# Altium PCB pidbot.PcbDoc
Units mm, origin at the board's own origin, x right, y up, seen from the top; angles counter-clockwise.
Board outline 66.55 x 54.25 mm, 2 copper layers (Top Layer, Bottom Layer); 52 components, 37 nets, 210 pads, 23 vias.
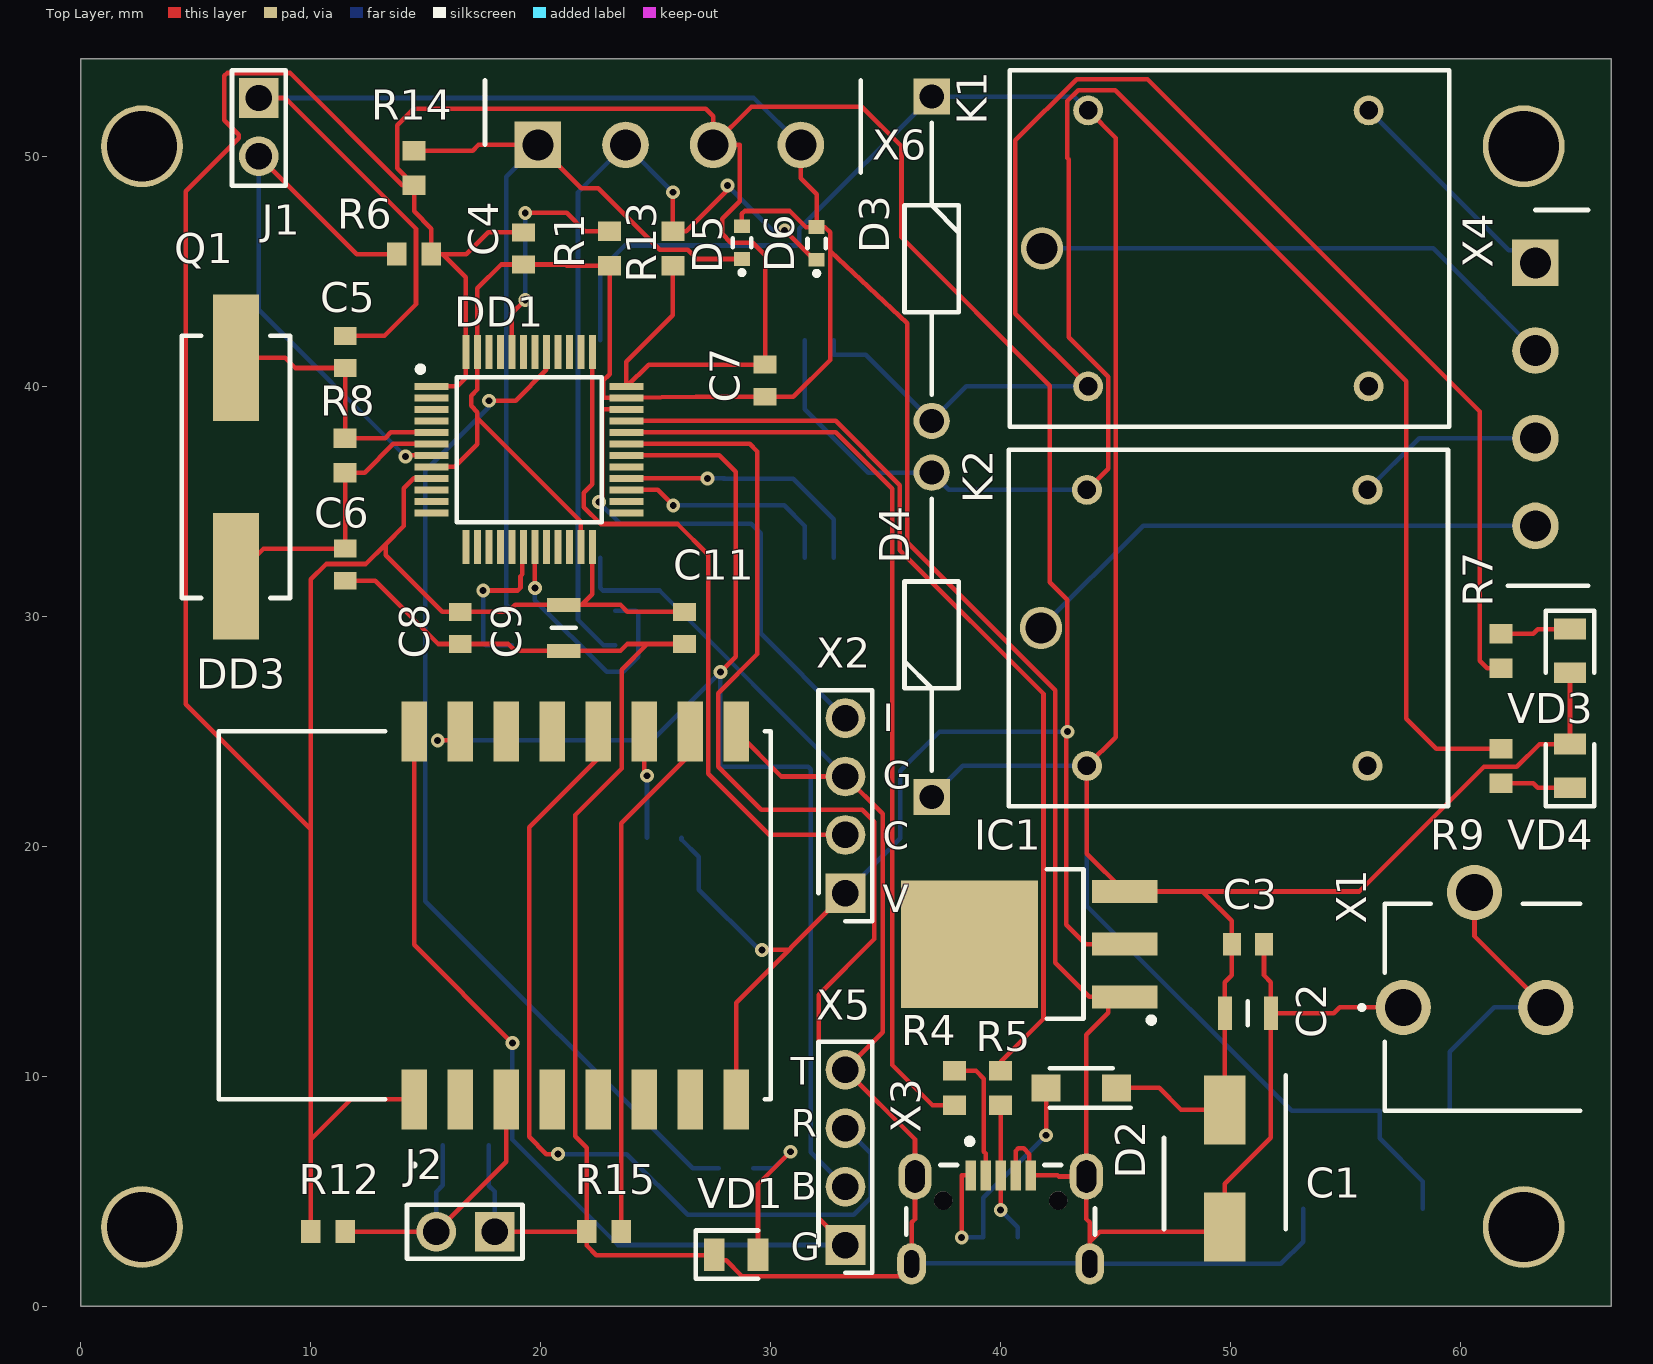
[diagram p0: Top Layer view]
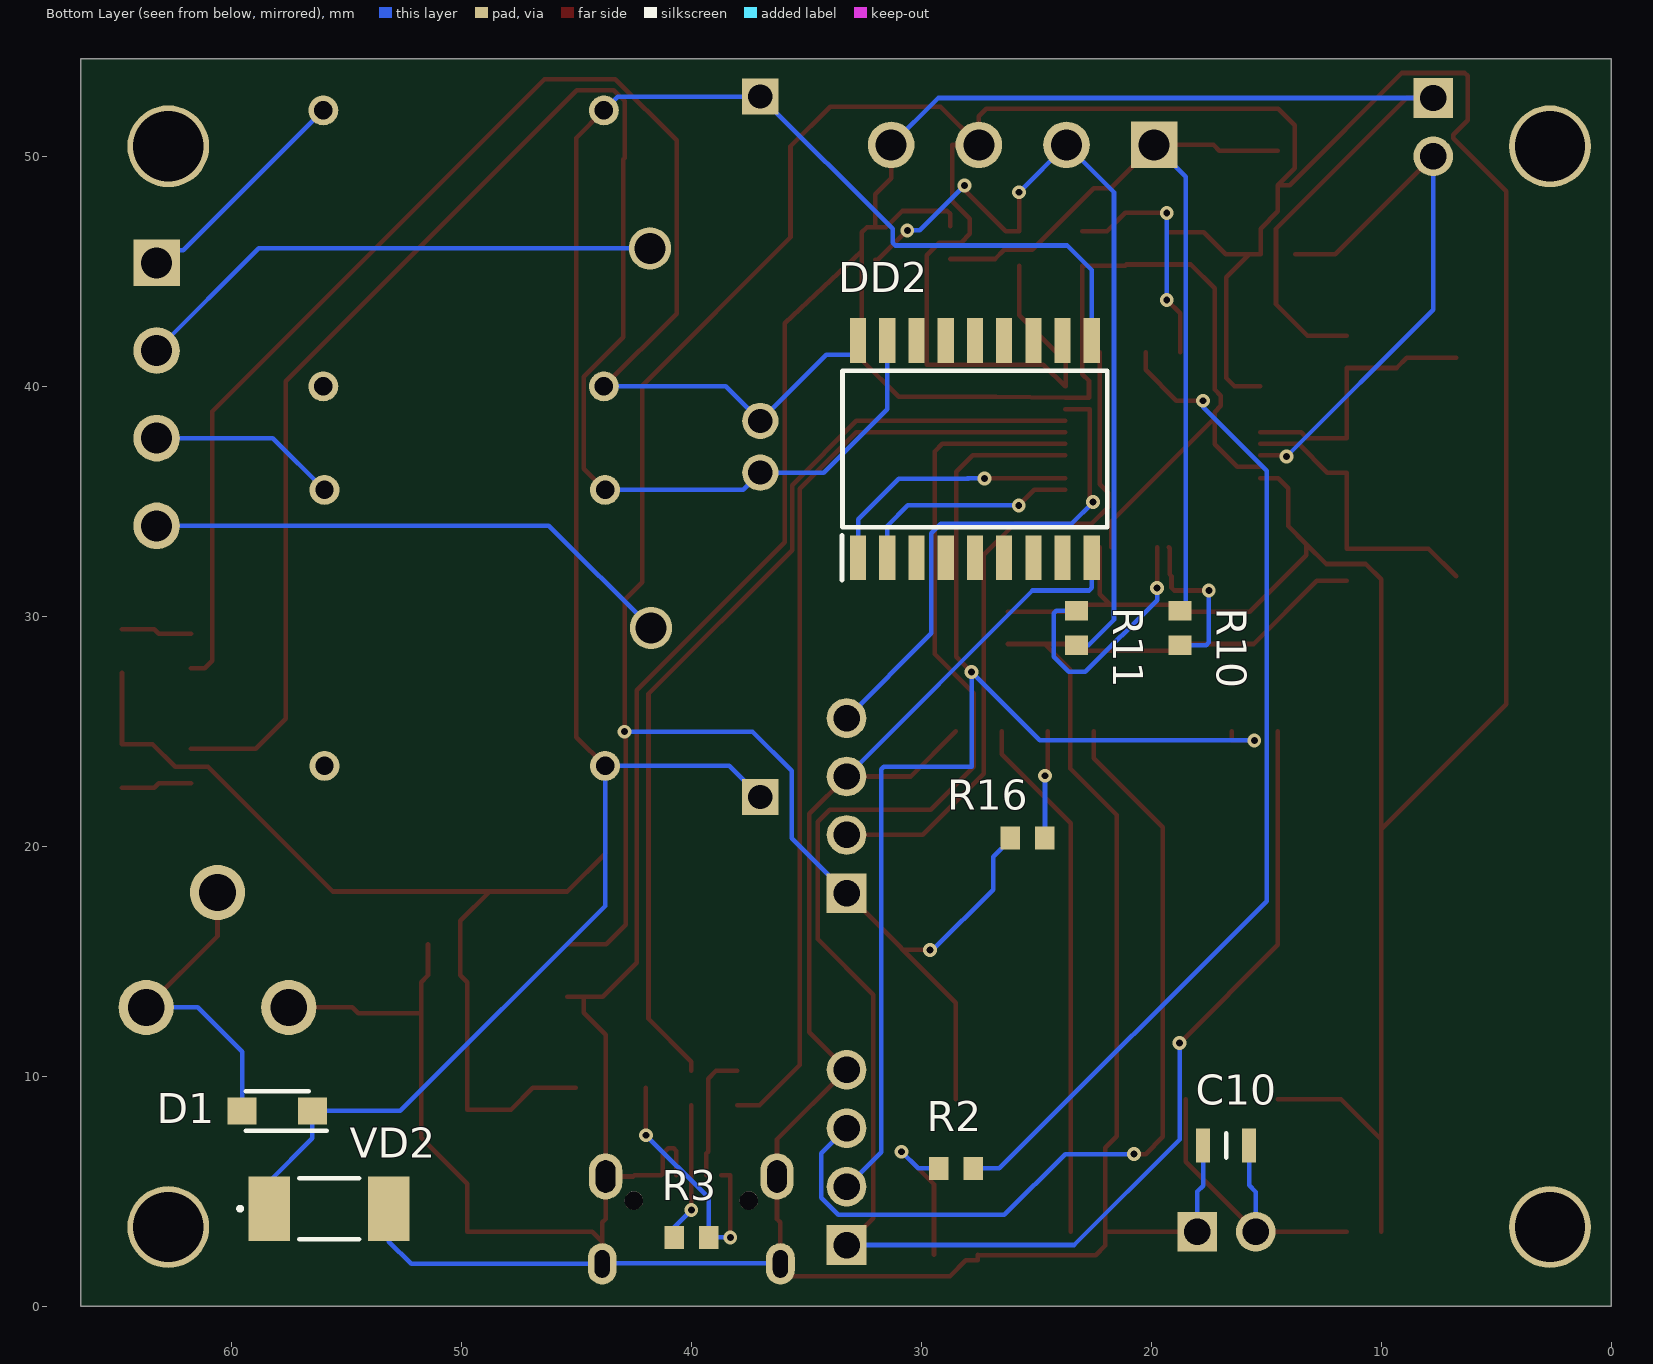
[diagram p1: Bottom Layer view, seen from below]
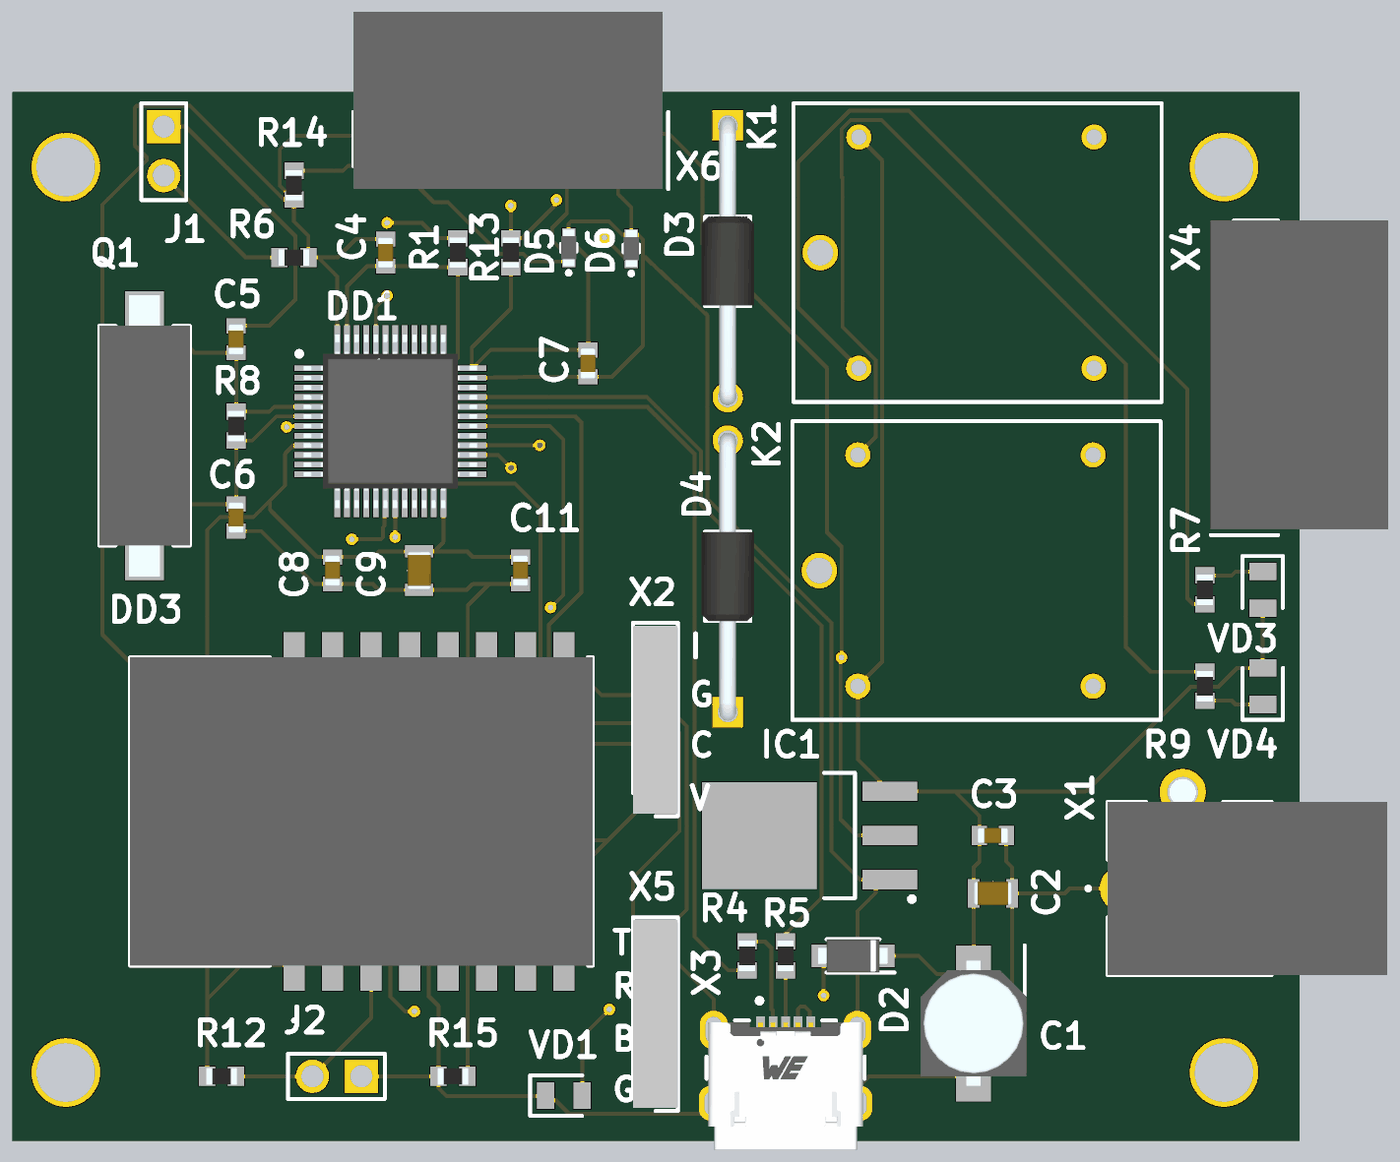
[diagram p2: 3D render of the assembled board from above, using the file's embedded part models]
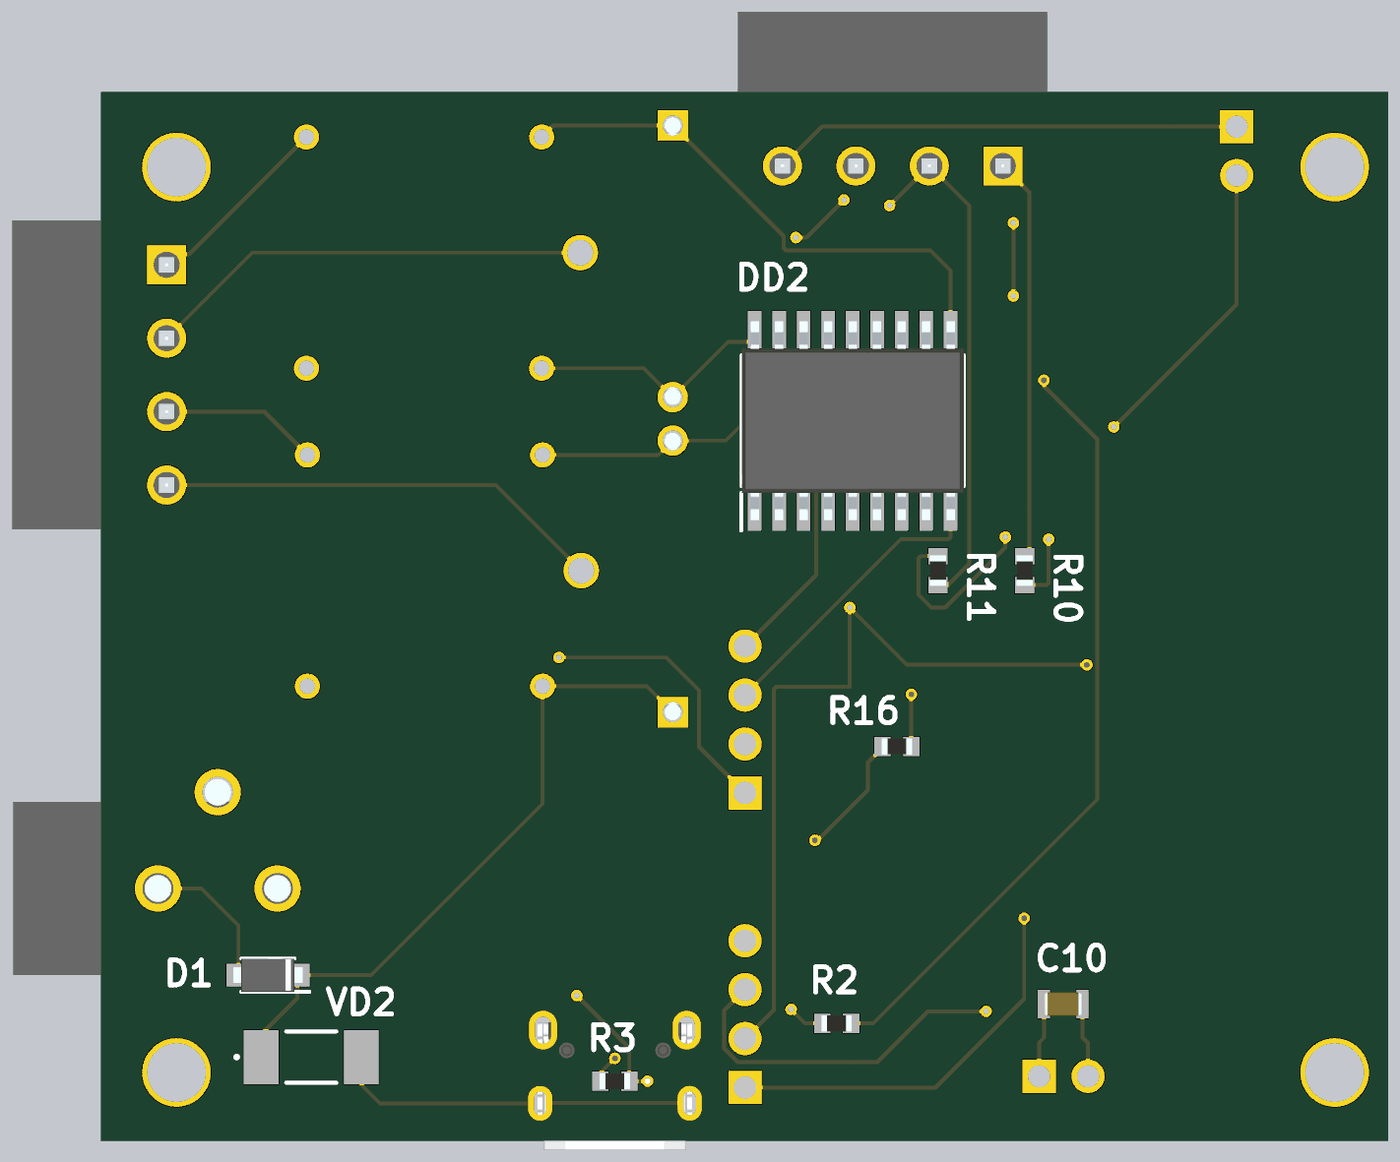
[diagram p3: 3D render of the assembled board from below, using the file's embedded part models]

## Layer stack, top to bottom
Top Solder: solder mask 0.0102, Solder Resist, Dk 3.5
Top Layer: signal copper 0.0356
Dielectric 1: dielectric 0.32, FR-4, Dk 4.8
Bottom Layer: signal copper 0.0356
Bottom Solder: solder mask 0.0102, Solder Resist, Dk 3.5

## Board outline
0,0 66.55,0 66.55,54.25 0,54.25

## Design rules (kind name [scope] priority, off if disabled: settings)
AcuteAngle [All] p1: minimum=3.50000000000000E+0001 checktracksonly=FALSE
BoardOutlineClearance "BoardOutlineClearance 1" [All] p1: gap=0.25 ignorepadtopadclearanceinfootprint=FALSE except(0: Arc-SplitContinuation Track-SplitContinuation SMDPad-SplitContinuation THPad-SplitContinuation Via-SplitContinuation Fill-SplitContinuation Poly-SplitContinuation Region-SplitContinuation Text-SplitContinuation) // Milling
BoardOutlineClearance "BoardOutlineClearance 2" [All] p2 off: gap=0.4 ignorepadtopadclearanceinfootprint=FALSE except(0: Arc-SplitContinuation Track-SplitContinuation SMDPad-SplitContinuation THPad-SplitContinuation Via-SplitContinuation Fill-SplitContinuation Poly-SplitContinuation Region-SplitContinuation Text-SplitContinuation) // V-Cut
Clearance "Clearance 3 Oz" [All] p1 off: gap=0.35 ignorepadtopadclearanceinfootprint=TRUE except(0.25: Arc-Hole Track-Hole SMDPad-Hole THPad-Hole Via-Hole Fill-Hole Poly-Hole Region-Hole Text-Hole)
Clearance "Clearance 2 Oz" [All] p2 off: gap=0.3 ignorepadtopadclearanceinfootprint=TRUE except(0.25: Arc-Hole Track-Hole SMDPad-Hole THPad-Hole Via-Hole Fill-Hole Poly-Hole Region-Hole Text-Hole)
Clearance "Clearance-1 1 Oz" [All] p3 off: gap=0.2 ignorepadtopadclearanceinfootprint=TRUE except(0.25: Arc-Hole Track-Hole SMDPad-Hole THPad-Hole Via-Hole Fill-Hole Poly-Hole Region-Hole Text-Hole) // Standart
Clearance "Clearance-2 1 Oz" [All] p4 off: gap=0.15 ignorepadtopadclearanceinfootprint=FALSE except(0.2: Arc-Fill Arc-Poly Track-Fill Track-Poly SMDPad-Fill SMDPad-Poly THPad-Fill THPad-Poly Via-Fill Via-Poly Fill-Fill Fill-Poly Poly-Poly; 0.25: Arc-Hole Track-Hole SMDPad-Hole THPad-Hole Via-Hole Fill-Hole Poly-Hole Region-Hole Text-Hole) // Advance
Clearance "Clearance-1 1/2 Oz" [All] p5: gap=0.125 ignorepadtopadclearanceinfootprint=FALSE except(0.2: Arc-Fill Arc-Poly Track-Fill Track-Poly SMDPad-SMDPad SMDPad-Fill SMDPad-Poly THPad-Fill THPad-Poly Via-Fill Via-Poly Fill-Fill Fill-Poly Poly-Poly Poly-Region Poly-Text; 0.25: Arc-Hole Track-Hole SMDPad-Hole THPad-Hole Via-Hole Fill-Hole Poly-Hole Region-Hole Text-Hole) // Standart
Clearance "Clearance-2 1/2 Oz" [All] p6 off: gap=0.1 ignorepadtopadclearanceinfootprint=FALSE except(0.15: Arc-Fill Arc-Poly Track-Fill Track-Poly SMDPad-SMDPad SMDPad-Fill SMDPad-Poly THPad-Fill THPad-Poly Via-Fill Via-Poly Fill-Fill Fill-Poly Poly-Poly Poly-Region Poly-Text; 0.25: Arc-Hole Track-Hole SMDPad-Hole THPad-Hole Via-Hole Fill-Hole Poly-Hole Region-Hole Text-Hole) // Advance
DiffPairsRouting "DiffPairsRouting 1 Oz" [All] p1 off: maxlimit=0.254 minlimit=0.2 mostfreqgap=0.254 toplayer_minwidth=0.2 toplayer_maxwidth=0.381 toplayer_prefwidth=0.381 bottomlayer_minwidth=0.2 bottomlayer_maxwidth=0.381 bottomlayer_prefwidth=0.381 maxuncoupledlength=12.7
DiffPairsRouting "DiffPairsRouting 1/2 Oz" [All] p2: maxlimit=0.254 minlimit=0.1 mostfreqgap=0.254 toplayer_minwidth=0.1 toplayer_maxwidth=0.381 toplayer_prefwidth=0.381 bottomlayer_minwidth=0.1 bottomlayer_maxwidth=0.381 bottomlayer_prefwidth=0.381 maxuncoupledlength=12.7
HoleSize "Minimum HoleSize" [IsPad] p1: absolutevalues=TRUE maxlimit=5.9 minlimit=0.6 maxpercent=80.000 minpercent=20.000
HoleSize "Minimum HoleSize VIA 1" [IsVia] p2: absolutevalues=TRUE maxlimit=5.9 minlimit=0.3 maxpercent=80.000 minpercent=20.000 // Standart
HoleSize "Minimum HoleSize VIA 2" [IsVia] p3 off: absolutevalues=TRUE maxlimit=5.9 minlimit=0.2 maxpercent=80.000 minpercent=20.000 // Advance
HoleToHoleClearance Hole2HoleClearance [All] p1: gap=0.25 allowstackedmicrovias=FALSE
MinimumAnnularRing "Minimum AR VIA Standart" [IsVia] p1: minimumring=0.15
MinimumAnnularRing "Minimum AR PAD Standart" [IsPAD] p2: minimumring=0.2
MinimumAnnularRing "Minimum AR VIA Advance" [IsVia] p3 off: minimumring=0.1
MinimumAnnularRing "Minimum AR PAD Advance" [IsPAD] p4 off: minimumring=0.15
MinimumSolderMaskSliver "SolderMask Bridge Standart" [All] p1 off: minsoldermaskwidth=0.15 // All Masks
MinimumSolderMaskSliver "SolderMask Bridge Advance" [All] p2: minsoldermaskwidth=0.1 // Mask LDI
PlaneClearance "PlaneClearance 3 Oz" [All] p1 off: clearance=0.35
PlaneClearance "PlaneClearance 2 Oz" [All] p2 off: clearance=0.3
PlaneClearance "PlaneClearance 1 Oz" [All] p3 off: clearance=0.2
PlaneClearance "PlaneClearance-1 1/2 Oz" [All] p4: clearance=0.2 // Standart
PlaneClearance "PlaneClearance-2 1/2 Oz" [All] p5 off: clearance=0.15 // Advance
PlaneConnect "TermalConnect 3 Oz" [All] p1 off: planeconnectstyle=Relief reliefexpansion=0.2 reliefentries=4 reliefconductorwidth=0.35 reliefairgap=0.35 // Standart
PlaneConnect "TermalConnect 2 Oz" [All] p2 off: planeconnectstyle=Relief reliefexpansion=0.2 reliefentries=4 reliefconductorwidth=0.3 reliefairgap=0.3 // Standart
PlaneConnect "TermalConnect-1 1 Oz" [All] p3 off: planeconnectstyle=Relief reliefexpansion=0.2 reliefentries=4 reliefconductorwidth=0.2 reliefairgap=0.2 // Standart
PlaneConnect "TermalConnect-2 1 Oz" [All] p4 off: pad.planeconnectstyle=Relief pad.reliefexpansion=0.15 pad.reliefentries=4 pad.reliefconductorwidth=0.2 pad.reliefairgap=0.2 via.planeconnectstyle=Direct via.reliefexpansion=0.15 via.reliefentries=4 via.reliefconductorwidth=0.15 via.reliefairgap=0.15 // Advance
PlaneConnect "TermalConnect-1 1/2 Oz" [All] p5: planeconnectstyle=Relief reliefexpansion=0.2 reliefentries=4 reliefconductorwidth=0.2 reliefairgap=0.2 // Standart
PlaneConnect "TermalConnect-2 1/2 Oz" [All] p6 off: pad.planeconnectstyle=Relief pad.reliefexpansion=0.15 pad.reliefentries=4 pad.reliefconductorwidth=0.15 pad.reliefairgap=0.15 via.planeconnectstyle=Direct via.reliefexpansion=0.15 via.reliefentries=4 via.reliefconductorwidth=0.15 via.reliefairgap=0.15 // Advance
PolygonConnect "PolygonConnect 3 Oz" [All] p1 off: thpad.connectstyle=Relief thpad.reliefconductorwidth=0.35 thpad.reliefentries=4 thpad.polygonreliefangle="90 Angle" thpad.airgapwidth=0.35 smdpad.connectstyle=Relief smdpad.reliefconductorwidth=0.35 smdpad.reliefentries=4 smdpad.polygonreliefangle="90 Angle" smdpad.airgapwidth=0.35 via.connectstyle=Direct via.reliefconductorwidth=0.254 via.reliefentries=4 via.polygonreliefangle="90 Angle" via.airgapwidth=0.254
PolygonConnect "PolygonConnect 2 Oz" [All] p2 off: thpad.connectstyle=Relief thpad.reliefconductorwidth=0.3 thpad.reliefentries=4 thpad.polygonreliefangle="90 Angle" thpad.airgapwidth=0.3 smdpad.connectstyle=Relief smdpad.reliefconductorwidth=0.3 smdpad.reliefentries=4 smdpad.polygonreliefangle="90 Angle" smdpad.airgapwidth=0.3 via.connectstyle=Direct via.reliefconductorwidth=0.254 via.reliefentries=4 via.polygonreliefangle="90 Angle" via.airgapwidth=0.254
PolygonConnect "PolygonConnect-1 1 Oz" [All] p3 off: thpad.connectstyle=Relief thpad.reliefconductorwidth=0.2 thpad.reliefentries=4 thpad.polygonreliefangle="90 Angle" thpad.airgapwidth=0.2 smdpad.connectstyle=Relief smdpad.reliefconductorwidth=0.2 smdpad.reliefentries=4 smdpad.polygonreliefangle="90 Angle" smdpad.airgapwidth=0.2 via.connectstyle=Direct via.reliefconductorwidth=0.254 via.reliefentries=4 via.polygonreliefangle="90 Angle" via.airgapwidth=0.254 // Standart
PolygonConnect "PolygonConnect-2 1 Oz" [All] p4 off: thpad.connectstyle=Relief thpad.reliefconductorwidth=0.15 thpad.reliefentries=4 thpad.polygonreliefangle="90 Angle" thpad.airgapwidth=0.15 smdpad.connectstyle=Relief smdpad.reliefconductorwidth=0.15 smdpad.reliefentries=4 smdpad.polygonreliefangle="90 Angle" smdpad.airgapwidth=0.15 via.connectstyle=Direct via.reliefconductorwidth=0.254 via.reliefentries=4 via.polygonreliefangle="90 Angle" via.airgapwidth=0.254 // Advance
PolygonConnect "PolygonConnect-1 1/2 Oz" [All] p5: thpad.connectstyle=Relief thpad.reliefconductorwidth=0.15 thpad.reliefentries=4 thpad.polygonreliefangle="90 Angle" thpad.airgapwidth=0.2 smdpad.connectstyle=Relief smdpad.reliefconductorwidth=0.2 smdpad.reliefentries=4 smdpad.polygonreliefangle="90 Angle" smdpad.airgapwidth=0.2 via.connectstyle=Direct via.reliefconductorwidth=0.254 via.reliefentries=4 via.polygonreliefangle="90 Angle" via.airgapwidth=0.254 // Standart
PolygonConnect "PolygonConnect-2 1/2 Oz" [All] p6 off: thpad.connectstyle=Relief thpad.reliefconductorwidth=0.125 thpad.reliefentries=4 thpad.polygonreliefangle="90 Angle" thpad.airgapwidth=0.15 smdpad.connectstyle=Relief smdpad.reliefconductorwidth=0.125 smdpad.reliefentries=4 smdpad.polygonreliefangle="90 Angle" smdpad.airgapwidth=0.15 via.connectstyle=Direct via.reliefconductorwidth=0.254 via.reliefentries=4 via.polygonreliefangle="90 Angle" via.airgapwidth=0.254 // Advance
RoomDefinition pidbot [InComponentClass('pidbot')] p1: confinementstyle=ConfineIn formatcopy=TRUE lockcomponents=FALSE outline 0,0 66.625,0 66.625,54.125 0,54.125
RoutingCorners [All] p1 off: cornerstyle=45-Degree minsetback=2.54 maxsetback=2.54
RoutingVias [All] p1: holewidth=0.3 width=0.6 viastyle="Through Hole" minholewidth=0.2 minwidth=0.4 maxholewidth=5.9 maxwidth=6.4
SilkToSilkClearance Silk2SilkClearance [All] p1 off: silktosilkclearance=0.15
SilkToSolderMaskClearance Silk2SolderMaskClearance [IsPad] p1 off: minsilkscreentomaskgap=0.15 clearancetoexposedcopper=TRUE
SolderMaskExpansion SolderMaskExpansion-1 [All] p1: expansion=0.05 istentingtop=FALSE // Standart
SolderMaskExpansion "SolderMaskExpansion LDI" [All] p2 off: expansion=0.025 istentingtop=FALSE // Advance
UnRoutedNet [All] p1: checkbadconnections=TRUE
Width "Width 3 Oz" [All] p1 off: maxlimit=10 minlimit=0.35 preferedwidth=0.4 checkconnectedcopper=TRUE
Width "Width 2 Oz" [All] p2 off: maxlimit=10 minlimit=0.3 preferedwidth=0.35 minimp=50.000000 maximp=50.000000 favimp=50.000000 checkconnectedcopper=TRUE
Width "Width 1 Oz" [All] p3: maxlimit=10 minlimit=0.2 preferedwidth=0.2 minimp=50.000000 maximp=50.000000 favimp=50.000000 checkconnectedcopper=TRUE
Width "Width 1/2 Oz" [All] p4 off: maxlimit=10 minlimit=0.1 preferedwidth=0.125 checkconnectedcopper=TRUE
20 further rules are at their usual default settings.

## Components (designator, comment, footprint, x,y, rotation, side; value= is the part's Value field where it differs from the comment)
C1 "470uF(CPOL)" CAPAE530X610N 49.75,6 r270 top
C2 "10uF(0805)" CAPC2012X145N 50.75,12.75 r0 top
C3 "0.1uF(0603)" CAPC1608X90N 50.75,15.75 r0 top
C4 "0.1uF(0603)" CAPC1608X90N 19.25,46 r270 top
C5 "27pF(0603)" CAPC1608X90N 11.5,41.5 r90 top
C6 "27pF(0603)" CAPC1608X90N 11.5,32.25 r270 top
C7 "0.1uF(0603)" CAPC1608X90N 29.75,40.25 r270 top
C8 "0.1uF(0603)" CAPC1608X90N 16.5,29.5 r90 top
C9 "10uF(0805)" CAPC2012X145N 21,29.5 r90 top
C10 "10uF(0805)" CAPC2012X145N 16.75,7 r0 bottom
C11 "0.1uF(0603)" CAPC1608X90N 26.25,29.5 r90 top
D1 "SS14FL" SODFL3617X108N 58,8.5 r0 bottom
D2 "SS14FL" SODFL3617X108N 43.5,9.5 r180 top
D3 "1N4002-T" DIOAD1408W86L464D236 37,52.6 r270 top
D4 "1N4002-T" DIOAD1408W86L464D236 37,22.15 r90 top
D5 "CPDH3V3UP" CPDH3V3UP 28.75,46.25 r90 top
D6 "CPDH3V3UP" CPDH3V3UP 32,46.215 r90 top
DD1 "stm32f103c8t6" QFP50P900X900X160-48N 19.5,37.25 r0 top
DD2 "ULN2803AFWG,C,EL" SOIC127P1032X285-18N 27.67,37.275 r90 bottom
DD3 "ESP-12S" ESP12S 18,17 r90 top
IC1 "NCP1117DT33RKG" TO229P990X238-4N 41.25,15.75 r180 top
J1 "103321-2" HDRV4W66P0X254_1X2_975X234X1036P 7.75,52.54 r270 top
J2 "103321-2" HDRV4W66P0X254_1X2_975X234X1036P 18,3.25 r180 top
K1 "SRD-05VDC-SL-C" SRD 41.8,46 r0 top
K2 "SRD-05VDC-SL-C" SRD 41.75,29.5 r0 top
Q1 "HC49SM-8-30-50-60-16-ATF" HC49SM830506016ATF 6.75,36.5 r270 top
R1 "10K(0603)" RESC1608X50N 23,46 r270 top
R2 "330(0603)" RESC1608X50N 28.5,6 r0 bottom
R3 "1500(0603)" RESC1608X50N 40,3 r180 bottom
R4 "22(0603)" RESC1608X50N 38,9.5 r90 top
R5 "22(0603)" RESC1608X50N 40,9.5 r270 top
R6 "10K(0603)" RESC1608X50N 14.5,45.75 r0 top
R7 "470(0603)" RESC1608X50N 61.75,28.5 r90 top
R8 "1M(0603)" RESC1608X50N 11.5,37 r270 top
R9 "470(0603)" RESC1608X50N 61.75,23.5 r270 top
R10 "10(0603)" RESC1608X50N 18.75,29.5 r270 bottom
R11 "10(0603)" RESC1608X50N 23.25,29.5 r90 bottom
R12 "1K(0603)" RESC1608X50N 10.75,3.25 r180 top
R13 "10K(0603)" RESC1608X50N 25.75,46 r90 top
R14 "10K(0603)" RESC1608X50N 14.5,49.5 r90 top
R15 "1K(0603)" RESC1608X50N 22.75,3.25 r180 top
R16 "1K(0603)" RESC1608X50N 25.375,20.375 r0 bottom
VD1 "KP-2012SGC" LEDC2012X110N 28.5,2.25 r0 top
VD2 "1N4733AUR" DO-213AB 55.75,4.25 r180 bottom
VD3 "KP-2012SGC" LEDC2012X110N 64.75,28.5 r270 top
VD4 "KP-2012SGC" LEDC2012X110N 64.75,23.5 r90 top
X1 "FC681465P" FC681465P 57.5,13 r180 top
X2 "103321-4" HDRV4W66P0X254_1X4_975X234X1036P 33.25,17.96 r90 top
X3 "*" Wurth_0_MFG 40,2.75 r0 top
X4 "15EDGRC-3.81-04P-14-00A_H_" SHDRRA4W80P0X381_1X4_1603X920X754P 63.25,45.37 r270 top
X5 "103321-4" HDRV4W66P0X254_1X4_975X234X1036P 33.25,2.67 r90 top
X6 "15EDGRC-3.81-04P-14-00A_H_" SHDRRA4W80P0X381_1X4_1603X920X754P 19.88,50.5 r0 top

## Footprints (in the part's own frame and the unit in brackets; to place one, negate y for a bottom-side part, rotate by r counter-clockwise, add the part's x,y. Pads: shape width x height; smd on the part's side, far side on the other; paste and mask are expansions set on the pad)
CAPAE530X610N [mm]
  rect 3x1.8 smd: 1(-2.55,0) 2(2.55,0)
  silkscreen extent -4.05,-2.65 2.65,2.65, body extent -3.25,-2.75 3.25,2.75, height 6.1
CAPC1608X90N [mm]
  rect 0.78x0.99 smd: 1(-0.7,0) 2(0.7,0)
  body extent -0.8,-0.41 0.8,0.41, height 0.9
CAPC2012X145N [mm]
  rect 0.62x1.47 smd: 1(-1,0) 2(1,0)
  silkscreen extent 0,-0.53 0,0.53, body extent -1,-0.63 1,0.63, height 1.45
CPDH3V3UP [mm]
  rect 0.6x0.7 smd: 1(-0.71,0) 2(0.71,0)
  silkscreen extent -1.4,-0.4 0.2,0.4, body extent -0.95,-0.4 0.95,0.4, height 0.87
DIOAD1408W86L464D236 [mm]
  rect 1.575x1.575 hole 1.05: 1(0,0)
  round 1.575 hole 1.05: 2(14.1,0)
  silkscreen extent 1.14,-1.18 12.96,1.18, body extent -0.43,-1.36 14.51,1.36, height 2.71
DO-213AB [mm]
  rect 1.8x2.8 smd: 1(-2.6,0) 2(2.6,0)
  silkscreen extent -3.91,-1.33 1.3,1.33
ESP12S [mm]
  rect 2.6x1.1 smd: 1(-8,3.5) 2(-8,1.5) 3(-8,-0.5) 4(-8,-2.5) 5(-8,-4.5) 6(-8,-6.5) 7(-8,-8.5) 8(-8,-10.5) 9(8,-10.5) 10(8,-8.5) 11(8,-6.5) 12(8,-4.5) 13(8,-2.5) 14(8,-0.5) 15(8,1.5) 16(8,3.5)
  silkscreen extent -10.9,-12 8,12, body extent -8,-12 8,12, height 3.1
FC681465P [mm]
  round 2.4 hole 1.6: 1(0,0) 2(-3.1,-5) 3(-6.2,0)
  silkscreen extent -7.7,-4.5 1.9,4.5, body extent -13.7,-5.7 0.8,4.5, height 11.1
HC49SM830506016ATF [mm]
  rect 5.5x2 smd: 1(-4.75,0) 2(4.75,0)
  silkscreen extent -5.7,-2.35 5.7,2.35, body extent -7.3,-2.35 7.3,2.35, height 4.1
HDRV4W66P0X254_1X2_975X234X1036P [mm]
  rect 1.725x1.725 hole 1.15: 1(0,0)
  round 1.725 hole 1.15: 2(2.54,0)
  silkscreen extent -1.21,-1.17 3.81,1.17
HDRV4W66P0X254_1X4_975X234X1036P [mm]
  rect 1.725x1.725 hole 1.15: 1(0,0)
  round 1.725 hole 1.15: 2(2.54,0) 3(5.08,0) 4(7.62,0)
  silkscreen extent -1.21,-1.17 8.83,1.17, body extent -1.07,-1.17 8.69,1.17, height 10.37
LEDC2012X110N [mm]
  rect 0.9x1.4 smd: 1(-0.95,0) 2(0.95,0)
  silkscreen extent -1.75,-1.05 0.95,1.05
QFP50P900X900X160-48N [mm]
  rect 1.475x0.3 smd: 1(-4.238,2.75) 2(-4.238,2.25) 3(-4.238,1.75) 4(-4.238,1.25) 5(-4.238,0.75) 6(-4.238,0.25) 7(-4.238,-0.25) 8(-4.238,-0.75) 9(-4.238,-1.25) 10(-4.238,-1.75) 11(-4.238,-2.25) 12(-4.238,-2.75) 25(4.238,-2.75) 26(4.238,-2.25) 27(4.238,-1.75) 28(4.238,-1.25) 29(4.238,-0.75) 30(4.238,-0.25) 31(4.238,0.25) 32(4.238,0.75) 33(4.238,1.25) 34(4.238,1.75) 35(4.238,2.25) 36(4.238,2.75)
  rect 0.3x1.475 smd: 13(-2.75,-4.238) 14(-2.25,-4.238) 15(-1.75,-4.238) 16(-1.25,-4.238) 17(-0.75,-4.238) 18(-0.25,-4.238) 19(0.25,-4.238) 20(0.75,-4.238) 21(1.25,-4.238) 22(1.75,-4.238) 23(2.25,-4.238) 24(2.75,-4.238) 37(2.75,4.238) 38(2.25,4.238) 39(1.75,4.238) 40(1.25,4.238) 41(0.75,4.238) 42(0.25,4.238) 43(-0.25,4.238) 44(-0.75,4.238) 45(-1.25,4.238) 46(-1.75,4.238) 47(-2.25,4.238) 48(-2.75,4.238)
  silkscreen extent -4.85,-3.15 3.15,3.62, body extent -4.5,-4.5 4.5,4.5, height 1.6
RESC1608X50N [mm]
  rect 0.85x1 smd: 1(-0.75,0) 2(0.75,0)
  body extent -0.79,-0.43 0.79,0.43, height 0.5
SHDRRA4W80P0X381_1X4_1603X920X754P [mm]
  rect 2.025x2.025 hole 1.35: 1(0,0)
  round 2.025 hole 1.35: 2(3.81,0) 3(7.62,0) 4(11.43,0)
  silkscreen extent -2.3,-1.2 14.03,2.3, body extent -2.3,-1.2 13.73,8, height 7.54
SODFL3617X108N [mm]
  rect 1.26x1.17 smd: 1(-1.525,0) 2(1.525,0)
  silkscreen extent -2.15,-0.86 1.38,0.86, body extent -1.8,-0.86 1.8,0.86, height 1.08
SOIC127P1032X285-18N [mm]
  rect 1.95x0.7 smd: 1(-4.725,5.08) 2(-4.725,3.81) 3(-4.725,2.54) 4(-4.725,1.27) 5(-4.725,0) 6(-4.725,-1.27) 7(-4.725,-2.54) 8(-4.725,-3.81) 9(-4.725,-5.08) 10(4.725,-5.08) 11(4.725,-3.81) 12(4.725,-2.54) 13(4.725,-1.27) 14(4.725,0) 15(4.725,1.27) 16(4.725,2.54) 17(4.725,3.81) 18(4.725,5.08)
  silkscreen extent -5.7,-5.76 3.4,5.78, body extent -5.16,-5.76 5.16,5.76, height 2.85
SRD [mm]
  round 1.84 hole 1.34: 1(0,0)
  round 1.3 hole 0.8: 2(2,6) 3(2,-6) 4(14.2,6) 5(14.2,-6)
  silkscreen extent -1.4,-7.75 17.7,7.75
TO229P990X238-4N [mm]
  rect 2.85x1 smd: 1(-4.15,2.29) 2(-4.15,0) 3(-4.15,-2.29)
  rect 5.95x5.55 smd: 4(2.6,0)
  silkscreen extent -5.43,-3.25 -0.75,3.42
Wurth_0_MFG [mm]
  rect 0.45x1.3 smd paste+0 mask+0: 1(-1.3,2.95) 2(-0.65,2.95) 3(0,2.95) 4(0.65,2.95) 5(1.3,2.95)
  rrect100% 1.45x2 hole 1.4 slot 0.85 at 0 deg paste-1000 mask+0: 6(-3.725,2.9) 7(3.725,2.9)
  rrect100% 1.25x1.8 hole 1.2 slot 0.65 at 0 deg paste-1000 mask+0: 8(-3.875,-0.9) 9(3.875,-0.9)
  round 0.8 hole 0.8 unplated paste-1000 mask+0: ""(-2.5,1.85) ""(2.5,1.85)
  silkscreen extent -4.1,0.37 4.1,4.55, body extent -4.55,-3.5 4.55,4, height 0.25

## Part data
C1: library part EEEFK0J470R, "Capacitor Polarised", Manufacturer_Name=Panasonic, Datasheet Link=https://industrial.panasonic.com/cdbs/www-data/pdf/RDE0000/ABA0000C1181.pdf, Height=6.1mm, Manufacturer_Part_Number=EEEFK0J470R
C2 C9 C10: library part C2012X6S1A106K125AB, "Capacitor", Manufacturer_Name=TDK, Mouser Part Number=810-C2012X6S1A106K1B, Datasheet Link=https://product.tdk.com/info/en/catalog/datasheets/mlcc_commercial_midvoltage_en.pdf, Height=1.45mm, Manufacturer_Part_Number=C2012X6S1A106K125AB, Mouser Price/Stock=https://www.mouser.com/Search/Refine.aspx?Keyword=810-C2012X6S1A106K1B
C3 C4 C5 C6 C7 C8 C11: library part 06035A270FAT2A, "Capacitor", Manufacturer_Name=AVX, Mouser Part Number=581-06035A270FAT2A, Datasheet Link=https://componentsearchengine.com/Datasheets/1/06031A100FAT2A.pdf, Height=0.9mm, Manufacturer_Part_Number=06035A270FAT2A, Mouser Price/Stock=http://www.mouser.com/Search/ProductDetail.aspx?qs=pLllxMKqYOUE57iRl783tA%3d%3d
D1 D2: "Schottky Diode", Manufacturer_Name="ON Semiconductor", Mouser Part Number=512-SS14FL, Arrow Part Number=SS14FL, Arrow Price/Stock=https://www.arrow.com/en/products/ss14fl/on-semiconductor, Datasheet Link=http://www.onsemi.com/pub/Collateral/SS14FL-D.PDF, Height=1.08mm, Manufacturer_Part_Number=SS14FL, Mouser Price/Stock=https://www.mouser.co.uk/ProductDetail/ON-Semiconductor-Fairchild/SS14FL?qs=tqW9UTzndZz8XxVZxr%252BlfQ%3D%3D
D3 D4: "Diode", Manufacturer_Name="Diodes Inc.", Mouser Part Number=621-1N4002-T, Arrow Part Number=1N4002-T, Arrow Price/Stock=https://www.arrow.com/en/products/1n4002-t/diodes-incorporated, Datasheet Link=http://www.diodes.com/_files/datasheets/ds28002.pdf, Manufacturer_Part_Number=1N4002-T, Mouser Price/Stock=https://www.mouser.co.uk/ProductDetail/Diodes-Incorporated/1N4002-T/?qs=rGAXPo9uwV21tVJRR%252BhxrQ%3D%3D
D5 D6: "TVS Diode (Uni-directional)", Manufacturer_Name="Comchip Technology", Mouser Part Number=750-CPDH3V3UP, Arrow Part Number=CPDH3V3UP, Arrow Price/Stock=https://www.arrow.com/en/products/cpdh3v3up/comchip-technology, Datasheet Link=http://www.comchiptech.com/admin/files/product/CPDH3V3UP-HF%20RevB034941.pdf, Height=0.77mm, Manufacturer_Part_Number=CPDH3V3UP, Mouser Price/Stock=https://www.mouser.co.uk/ProductDetail/Comchip-Technology/CPDH3V3UP?qs=tw%252BuQ%2FB6PO1cIMMFw61gpA%3D%3D
DD1: "Integrated Circuit", Arrow Part Number=STM32F103C8T6, Manufacturer_Name=STMicroelectronics, Mouser Part Number=511-STM32F103C8T6, Arrow Price/Stock=https://www.arrow.com/en/products/stm32f103c8t6/stmicroelectronics, Datasheet Link=https://www.st.com/resource/en/datasheet/stm32f103c8.pdf, Height=1.6mm, Manufacturer_Part_Number=stm32f103c8t6, Mouser Price/Stock=https://www.mouser.co.uk/ProductDetail/STMicroelectronics/STM32F103C8T6/?qs=bhCVus9SdFtq6kqxsU5%2FDA%3D%3D
DD2: "Integrated Circuit", Manufacturer_Name=Toshiba, Mouser Part Number=N/A, Arrow Part Number=ULN2803AFWG,C,EL, Arrow Price/Stock=https://www.arrow.com/en/products/uln2803afwgcel/toshiba, Datasheet Link=http://toshiba.semicon-storage.com/info/docget.jsp?did=7064&prodName=ULN2803AFWG, Height=2.85mm, Manufacturer_Part_Number=ULN2803AFWG,C,EL, Mouser Price/Stock=https://www.mouser.co.uk/ProductDetail/Toshiba/ULN2803AFWGCEL?qs=vPP9GyyTAo2p%2FYO7mXoxbQ%3D%3D
DD3: "Integrated Circuit", Manufacturer_Name="RF SOLUTIONS", Mouser Part Number=223-ESP-12S, Datasheet Link=https://www.rfsolutions.co.uk/downloads/1594041895DS-ESP-12S-1.pdf, Height=3mm, Manufacturer_Part_Number=ESP-12S, Mouser Price/Stock=https://www.mouser.co.uk/ProductDetail/RF-Solutions/ESP-12S/?qs=UkDUCjYnTB27YArJ5wHUxg%3D%3D
IC1: "Integrated Circuit", Manufacturer_Name="ON Semiconductor", Mouser Part Number=863-NCP1117DT33RKG, Arrow Part Number=NCP1117DT33RKG, Arrow Price/Stock=https://www.arrow.com/en/products/ncp1117dt33rkg/on-semiconductor, Datasheet Link=http://www.onsemi.com/pub/Collateral/NCP1117-D.PDF, Height=2.38mm, Manufacturer_Part_Number=NCP1117DT33RKG, Mouser Price/Stock=https://www.mouser.co.uk/ProductDetail/ON-Semiconductor/NCP1117DT33RKG/?qs=Gev%252BmEvV0ibOCOlPKZVI0Q%3D%3D
J1 J2: "Connector", Arrow Part Number=103321-4, Manufacturer_Name="TE Connectivity", Mouser Part Number=571-1033214, Arrow Price/Stock=https://www.arrow.com/en/products/103321-4/te-connectivity, Datasheet Link=https://www.mouser.com/datasheet/2/418/NG_CD_103321_R_baseFilename-1229694.pdf, Height=10.363mm, Manufacturer_Part_Number=103321-4, Mouser Price/Stock=https://www.mouser.co.uk/ProductDetail/TE-Connectivity-AMP/103321-4?qs=HSGlLeu24BNC%2F8%2Fb5G2HmQ%3D%3D
K1 K2: "Relay or Contactor", Manufacturer_Name="Songle Relay", Datasheet Link=http://files.microjpm.webnode.com/200001010-dda41de9e1/Songle%20Relay%20Datasheet.pdf, Manufacturer_Part_Number=SRD-05VDC-SL-C
Q1: "Crystal or Oscillator", Manufacturer_Name=MULTICOMP, Datasheet Link=http://www.farnell.com/datasheets/1661828.pdf, Height=4mm, Manufacturer_Part_Number=HC49SM-8-30-50-60-16-ATF
R1 R2 R3 R4 R5 R6 R7 R8 R9 R10 R11 R12 R13 R14 R15 R16: library part CRCW06031M10FKEA, "Resistor", Manufacturer_Name=Vishay, Mouser Part Number=71-CRCW06031M10FKEA, Arrow Part Number=CRCW06031M10FKEA, Arrow Price/Stock=https://www.arrow.com/en/products/crcw06031m10fkea/vishay, Datasheet Link=http://www.vishay.com/docs/20035/dcrcwe3.pdf, Height=0.5mm, Manufacturer_Part_Number=CRCW06031M10FKEA, Mouser Price/Stock=https://www.mouser.co.uk/ProductDetail/Vishay-Dale/CRCW06031M10FKEA?qs=dFaIlcvhQOTbdXNp0izuyw%3D%3D
VD1 VD3 VD4: "LED", Manufacturer_Name=Kingbright, Mouser Part Number=N/A, Arrow Part Number=KP-2012SGC, Arrow Price/Stock=https://www.arrow.com/en/products/kp-2012sgc/kingbright, Datasheet Link=http://my.rs-online.com/webdocs/032f/0900766b8032fa8b.pdf, Height=1.1mm, Manufacturer_Part_Number=KP-2012SGC, Mouser Price/Stock=https://www.mouser.co.uk/ProductDetail/Kingbright/KP-2012SGC?qs=2JU0tDl2GZ0tniaU1HaSiA%3D%3D
VD2: "Zener Diode", Manufacturer_Name="Microsemi Corporation", Mouser Part Number=494-1N4733AUR, Datasheet Link=https://www.microsemi.com/document-portal/doc_download/11016-sd12a-datasheet, Manufacturer_Part_Number=1N4733AUR, Mouser Price/Stock=https://www.mouser.com/Search/Refine.aspx?Keyword=494-1N4733AUR
X1: "Connector", Manufacturer_Name="CLIFF ELECTRONIC COMPONENTS", Datasheet Link=http://www.farnell.com/datasheets/2286781.pdf, Height=11mm, Manufacturer_Part_Number=FC681465P
X2 X5: "Connector", Manufacturer_Name="TE Connectivity", Mouser Part Number=571-1033214, Arrow Part Number=103321-4, Arrow Price/Stock=https://www.arrow.com/en/products/103321-4/te-connectivity, Datasheet Link=https://www.mouser.com/datasheet/2/418/NG_CD_103321_R_baseFilename-1229694.pdf, Height=10.363mm, Manufacturer_Part_Number=103321-4, Mouser Price/Stock=https://www.mouser.co.uk/ProductDetail/TE-Connectivity-AMP/103321-4?qs=HSGlLeu24BNC%2F8%2Fb5G2HmQ%3D%3D
X3: library part 629105150521
X4 X6: "Connector", Manufacturer_Name=Degson, Manufacturer_Part_Number=15EDGRC-3.81-04P-14-00A(H), Datasheet Link=https://datasheet.octopart.com/15EDGRC-3.81-04P-14-00A%28H%29-Degson-datasheet-17801160.pdf, Height=7.54mm

## Free pads (board coordinates)
  round 3.556 hole 3.048: H1(2.669,3.45) H1(2.669,50.44) H1(62.74,3.45) H1(62.74,50.44)

## Via types
v1: diameter 0.6, hole 0.3, Top Layer to Bottom Layer, 23 vias

## Nets (pads, with @x,y where several pads share a name; then routed paths per layer and width w, separated by ;. In a path a pad name is that pad's centre, name@x,y a point inside that pad or via, vN(x,y) a via of type N, cw(c..) or ccw(c..) an arc to the next point about the centre after c; other vN are vias at no path point)
+5V: C1.1 C2.1 C3.1 D1.1 D2.1 D3.1 D4.1 DD2.10 IC1.3 K1.2 K2.3 VD2.1 VD3.2 VD4.2 | length 138.9
  Top Layer w0.2: K1.2 45,50.8 45,24.75 K2.3 43.75,19.69 IC1.3 48.77,18.04 ; D2.1 46.89,9.5 47.84,8.55 C1.1 C2.1 49.75,14.093 50.05,14.393 C3.1 50.05,16.76 48.77,18.04 ; VD3.2 VD4.2 63.426,24.45 62.441,23.465 61.013,23.465 55.588,18.04 48.77,18.04
  Bottom Layer w0.2: DD2.10 22.59,45.063 23.652,46.125 31.133,46.125 31.25,46.242 31.25,46.85 D3.1 43.2,52.6 K1.2 ; D4.1 38.35,23.5 K2.3 43.75,17.411 52.661,8.5 D1.1 56.475,7.306 58.35,5.431 VD2.1
GND: C1.2 C2.2 C3.2 C4.2 C5.2 C6.2 C7.2 C8.1 C9.1 C10.2 C11.1 D5.2 D6.2 DD1.8 DD1.23 DD1.35 DD1.47 DD2.9 DD3.9 IC1.1 J1.1 J2.1 R1.2 R15.2 VD1.1 VD2.2 X1.1 X2.3 X3.4 X3.5 X3.6 X3.7 X3.8 X3.9 X5.4 X6.4 | length 306.2
  Top Layer w0.2: J1.1 8.9,52.54 14.582,46.859 14.582,43.572 13.21,42.2 C5.2 ; C6.2 12.804,31.55 15.554,28.8 C8.1 18.595,28.8 18.895,28.5 C9.1 23.472,28.5 23.772,28.8 24.64,28.8 ; DD1.8 16.264,36.5 17.25,37.486 17.25,38.628 ; J2.1 R15.2 ; DD1.23 21.75,34.128 17.25,38.628 ; C11.1 24.64,28.8 ; VD1.1 VD1.1@27.55,2.231 ; DD3.9 30.46,23.04 X2.3 34.875,21.415 34.875,11.915 X5.4 36.275,7.265 X3.6 36.275,3.803 36.125,3.653 X3.8 36.125,1.316 28.755,1.316 28.069,2.002 27.55,2.002 VD1.1@27.55,2.231 ; D5.2 28.75,47.508 28.867,47.625 30.835,47.625 31.535,46.925 D6.2 ; X6.4 31.31,49.047 32,48.357 D6.2 ; X3.4 40.65,6.758 40.767,6.875 41,6.875 41.25,6.625 X3.5@41.25,5.75 ; X3.5 42.471,5.7 42.521,5.65 X3.7 ; X3.9 43.875,2.815 ; IC1.1 IC1.1@44.681,13.46 ; C3.2 51.45,14.393 51.75,14.093 C2.2 ; X1.1 54.735,13 54.485,12.75 C2.2 ; 17.25,38.628 17.25,38.883 16.975,39.158 16.975,39.592 17.25,39.868 DD1.47 17.25,44.26 18.29,45.3 C4.2 21.084,45.3 21.134,45.25 R1.2 23,40.534 22.71,40.244 22.71,39.5 DD1.35 26.747,39.55 C7.2 30.99,39.55 32.59,41.15 32.59,45.876 ; R15.2 22,2.648 22.417,2.231 VD1.1@27.55,2.231 ; R15.2 22,6.894 21.5,7.394 21.5,21.367 23.522,23.389 23.522,27.682 24.64,28.8 ; D6.2 32.362,46.925 32.59,46.696 32.59,45.876 ; 32.59,45.876 35.938,42.749 35.938,33.224 42.369,26.793 42.369,14.941 43.85,13.46 IC1.1@44.681,13.46 ; X3.7 43.725,11.816 44.681,12.772 IC1.1@44.681,13.46 ; X3.7 43.725,3.803 43.875,3.653 43.875,2.815 ; 43.875,2.815 44.307,3.247 49.75,3.247 C1.2 49.75,5.33 51.75,7.33 C2.2
  Bottom Layer w0.2: J1.1 29.27,52.54 X6.4 ; C10.2 17.75,5.249 18,4.999 J2.1 ; DD2.9 22.59,31.242 22.707,31.125 25.165,31.125 X2.3 ; X3.8 36.125,1.875 43.875,1.875 X3.9 52.185,1.85 53.15,2.815 VD2.2
NetC5_1: C5.1 DD1.5 Q1.1 R8.1 | length 11.9
  Top Layer w0.2: Q1.1 8.892,41.25 9.342,40.8 C5.1 R8.1 13.235,37.75 13.485,38 DD1.5
NetC6_1: C6.1 DD1.6 Q1.2 R8.2 | length 12.8
  Top Layer w0.2: Q1.2 7.95,32.95 C6.1 R8.2 12.349,36.25 13.599,37.5 DD1.6
NetC10_1: C10.1 DD3.3 J2.2 R12.1 | length 14.8
  Top Layer w0.2: R12.1 J2.2 18.5,6.29 DD3.3
  Bottom Layer w0.2: J2.2 15.46,4.974 15.75,5.264 C10.1
NetD1_2: D1.2 X1.2 X1.3 | length 13.8
  Top Layer w0.2: X1.2 60.6,16.1 X1.3
  Bottom Layer w0.2: D1.2 59.525,11.07 61.455,13 X1.3
NetD2_2: D2.2 R3.2 X3.1 | length 11.7
  Top Layer w0.2: v1(38.305,3) 38.305,5.7 X3.1 ; v1(41.975,7.445) D2.2
  Bottom Layer w0.2: v1(38.305,3) R3.2 39.25,4.72 v1(41.975,7.445)
NetD3_2: D3.2 DD2.18 K1.3 R7.1 | length 64.7
  Top Layer w0.2: K1.3 40.642,43.158 40.642,50.694 43.309,53.361 46.382,53.361 60.835,38.908 60.835,28.067 61.152,27.75 R7.1
  Bottom Layer w0.2: DD2.18 32.75,41.372 34.128,41.372 D3.2 38.5,40 K1.3
NetD4_2: D4.2 DD2.17 K2.2 R9.1 | length 74.2
  Top Layer w0.2: K2.2 44.675,36.425 44.675,40.413 42.953,42.134 42.953,49.881 42.903,49.932 42.903,52.409 43.372,52.878 44.985,52.878 57.637,40.227 57.637,25.543 58.93,24.25 R9.1
  Bottom Layer w0.2: DD2.17 31.48,39.01 34.24,36.25 D4.2 37.75,35.5 K2.2
NetD5_1: D5.1 R10.1 R14.2 X6.1 | length 37.3
  Top Layer w0.2: R14.2 17.045,50.25 17.295,50.5 X6.1 21.769,48.611 22.506,48.611 25.173,45.944 26.393,45.944 26.797,45.54 D5.1
  Bottom Layer w0.2: R10.1 18.5,30.5 18.5,49.12 X6.1
NetD6_1: D6.1 R11.1 R13.2 X6.2 | length 36.7
  Top Layer w0.2: v1(25.75,48.44) R13.2 26.335,46.75 28.12,48.535 v1(28.12,48.738) ; v1(30.609,46.782) 31.886,45.505 D6.1
  Bottom Layer w0.2: R11.1 22.733,28.75 21.625,29.858 21.625,48.435 X6.2 v1(25.75,48.44) ; v1(28.12,48.738) 30.076,46.782 v1(30.609,46.782)
NetDD1_7: DD1.7 J1.2 R6.1 | length 24.6
  Top Layer w0.2: J1.2 12,45.75 R6.1 ; v1(14.124,36.953) 14.172,37 DD1.7
  Bottom Layer w0.2: J1.2 7.75,43.327 v1(14.124,36.953)
NetDD1_18: DD1.18 R10.2 | length 7.1
  Top Layer w0.2: v1(17.5,31.125) 19.008,31.125 19.125,31.242 19.125,31.75 19.2,31.825 19.2,32.962 DD1.18
  Bottom Layer w0.2: v1(17.5,31.125) 17.5,28.867 17.617,28.75 R10.2
NetDD1_19: DD1.19 R11.2 | length 11.3
  Top Layer w0.2: v1(19.75,31.238) DD1.19
  Bottom Layer w0.2: v1(19.75,31.238) 19.75,30.705 22.866,27.589 23.589,27.589 24.25,28.25 24.25,30.133 24.133,30.25 R11.2
NetDD1_27: DD1.27 DD2.2 | length 9.8
  Top Layer w0.2: DD1.27 25.092,35.5 v1(25.765,34.827)
  Bottom Layer w0.2: v1(25.765,34.827) 30.583,34.827 31.48,33.93 DD2.2
NetDD1_28: DD1.28 DD2.1 | length 11.5
  Top Layer w0.2: DD1.28 v1(27.25,36)
  Bottom Layer w0.2: v1(27.25,36) 27.929,36 ; 28,36 27.929,36 ; DD2.1 32.75,34.227 30.99,35.987 27.942,35.987 27.929,36
NetDD1_30: DD1.30 DD3.15 X5.2 | length 55.8
  Top Layer w0.2: v1(15.521,24.608) 16.5,24.608 DD3.15 ; DD1.30 27.768,37 28.475,36.292 28.475,28.24 v1(27.815,27.58)
  Bottom Layer w0.2: v1(15.521,24.608) 24.843,24.608 v1(27.815,27.58) 27.815,23.465 31.633,23.465 31.75,23.348 31.75,6.71 X5.2
NetDD1_31: DD1.31 DD3.16 X5.1 | length 83.8
  Top Layer w0.2: DD3.16 14.5,15.724 v1(18.773,11.451) ; DD1.31 29.085,37.5 29.415,37.17 29.415,28.367 27.713,26.666 27.713,23.465 29.591,21.588 33.98,21.588 34.5,21.068 34.5,15.977 32.082,13.559 32.082,3.838 X5.1
  Bottom Layer w0.2: v1(18.773,11.451) 18.773,7.26 23.363,2.67 X5.1
NetDD1_32: DD1.32 R4.1 | length 41.1
  Top Layer w0.2: DD1.32 32.835,38 35.288,35.547 35.288,10.497 37.035,8.75 R4.1
NetDD1_33: DD1.33 R5.1 | length 41.8
  Top Layer w0.2: DD1.33 32.821,38.5 35.613,35.708 35.613,32.882 41.861,26.634 41.861,12.499 40,10.638 R5.1
NetDD1_34: DD1.34 X2.4 | length 22.3
  Top Layer w0.2: v1(22.532,34.971) 22.684,35.124 22.684,39 DD1.34
  Bottom Layer w0.2: v1(22.532,34.971) 23.472,34.032 29.148,34.032 29.568,33.613 29.568,29.262 X2.4
NetDD1_37: DD1.37 X2.2 | length 29.8
  Top Layer w0.2: DD1.37 22.25,35.754 21.875,35.379 21.875,34.75 22.607,34.018 25.949,34.018 27.282,32.685 27.282,23.155 29.936,20.5 X2.2
NetDD1_41: DD1.41 R2.1 | length 44.3
  Top Layer w0.2: v1(17.75,39.375) 18.909,39.375 20.25,40.716 DD1.41
  Bottom Layer w0.2: v1(17.75,39.375) 17.75,39.09 14.988,36.328 14.988,17.623 26.611,6 R2.1
NetDD1_44: DD1.44 R1.1 | length 10.3
  Top Layer w0.2: DD1.44 18.75,43.176 v1(19.331,43.757) ; v1(19.331,47.544) 21.135,47.544 21.929,46.75 R1.1
  Bottom Layer w0.2: v1(19.331,43.757) v1(19.331,47.544)
NetDD3_10: DD3.10 R15.1 | length 23
  Top Layer w0.2: R15.1 23.5,21.004 26.5,24.004 DD3.10
NetDD3_11: DD3.11 R16.1 | length 4.7
  Top Layer w0.2: DD3.11 24.5,23.199 v1(24.625,23.074)
  Bottom Layer w0.2: R16.1 v1(24.625,23.074)
NetDD3_12: DD3.12 X5.3 | length 38.9
  Top Layer w0.2: v1(20.75,6.625) 20.25,6.625 19.5,7.375 19.5,20.84 22.5,23.84 DD3.12
  Bottom Layer w0.2: v1(20.75,6.625) 23.751,6.625 26.393,3.983 33.606,3.983 34.343,4.72 34.343,6.657 X5.3
NetK1_1: K1.1 X4.2 | length 23.3
  Bottom Layer w0.2: K1.1 58.81,46 X4.2
NetK1_4: K1.4 X4.1 | length 10.3
  Bottom Layer w0.2: K1.4 62.081,45.919 63.25,45.919 X4.1
NetK2_1: K2.1 X4.4 | length 23.3
  Bottom Layer w0.2: K2.1 46.19,33.94 X4.4
NetK2_4: K2.4 X4.3 | length 8.2
  Bottom Layer w0.2: K2.4 58.2,37.75 X4.3
NetR2_2: R2.2 VD1.2 | length 7
  Top Layer w0.2: VD1.2 29.45,5.314 v1(30.863,6.727)
  Bottom Layer w0.2: R2.2 30.136,6 v1(30.863,6.727)
NetR3_1: R3.1 R5.2 X3.3 | length 6.1
  Top Layer w0.2: v1(40,4.187) X3.3 R5.2
  Bottom Layer w0.2: v1(40,4.187) 40.75,3.437 R3.1
NetR4_2: R4.2 X3.2 | length 5.7
  Top Layer w0.2: R4.2 38.927,10.25 39.27,9.907 39.27,6.73 39.35,6.65 X3.2
NetR7_2: R7.2 VD3.1 | length 3.1
  Top Layer w0.2: R7.2 63.146,29.25 63.346,29.45 VD3.1
NetR9_2: R9.2 VD4.1 | length 3.1
  Top Layer w0.2: R9.2 63.146,22.75 63.346,22.55 VD4.1
VCC: C4.1 C7.1 C8.2 C9.2 C11.2 DD1.1 DD1.9 DD1.24 DD1.36 DD1.48 DD3.1 DD3.8 IC1.2 R6.2 R12.2 R13.1 R14.1 R16.2 X2.1 X6.3 | length 246
  Top Layer w0.2: R12.2 10,7.26 ; DD3.1 14.5,9.013 11.753,9.013 10,7.26 ; DD1.9 14.48,36 14.048,35.568 14.048,33.93 13.261,33.143 ; DD1.1 16.385,40 16.75,40.365 DD1.48 16.75,44.75 15.75,45.75 ; C4.1 17.716,46.7 16.766,45.75 15.75,45.75 ; DD1.24 22.25,30.967 21.782,30.5 ; R13.1 25.75,43.099 23.726,41.075 23.726,40 DD1.36 23.751,40 24.701,40.95 C7.1 29.771,40.95 29.771,45.703 29.224,46.25 28.271,46.25 27.891,46.63 27.891,47.29 28.653,48.052 28.653,50.5 X6.3 ; C11.2 23.772,30.2 23.472,30.5 21.782,30.5 ; DD3.8 28.5,13.21 X2.1 ; v1(29.625,15.5) 30.75,15.5 ; v1@42.852,24.938 42.852,16.588 43.69,15.75 IC1.2 ; v1(42.903,24.989) 42.903,30.73 42.141,31.492 42.141,40.026 35.689,46.478 35.689,50.44 33.962,52.167 29.167,52.167 X6.3 ; 10,7.26 10,20.75 ; 10,20.75 4.566,26.184 4.566,48.48 6.868,50.782 6.868,50.948 6.25,51.566 6.25,53.51 6.367,53.628 9.108,53.628 13.986,48.75 R14.1 ; 10,20.75 10,31.609 10.67,32.279 12.397,32.279 13.261,33.143 ; 13.261,33.143 13.261,32.66 15.721,30.2 C8.2 18.595,30.2 18.895,30.5 C9.2 21.782,30.5 ; R14.1 13.769,49.481 13.769,51.354 14.48,52.066 27.18,52.066 27.5,51.746 X6.3 ; R14.1 14.5,47.609 15.25,46.859 R6.2 15.75,45.75
  Bottom Layer w0.2: R16.2 26.125,20.3 26.875,19.55 26.875,18.125 29.5,15.5 v1(29.625,15.5) ; X2.1 35.638,20.348 35.638,23.287 37.34,24.989 v1(42.903,24.989) v1@42.852,24.938
pads on no net: DD1.2 DD1.3 DD1.4 DD1.10 DD1.11 DD1.12 DD1.13 DD1.14 DD1.15 DD1.16 DD1.17 DD1.20 DD1.21 DD1.22 DD1.25 DD1.26 DD1.29 DD1.38 DD1.39 DD1.40 DD1.42 DD1.43 DD1.45 DD1.46 DD2.3 DD2.4 DD2.5 DD2.6 DD2.7 DD2.8 DD2.11 DD2.12 DD2.13 DD2.14 DD2.15 DD2.16 DD3.2 DD3.4 DD3.5 DD3.6 DD3.7 DD3.13 DD3.14 IC1.4 K1.5 K2.5 X3.

## Silkscreen, mask and mechanical layers (free items; w line width, h text height)
Top Overlay:
  text "I" at 34.879,25.004 h1.2
  text "G" at 34.879,22.504 h1.2
  text "C" at 34.879,19.879 h1.2
  text "V" at 34.879,17.129 h1.2
  text "T" at 30.879,9.629 h1.2
  text "R" at 30.879,7.379 h1.2
  text "B" at 30.879,4.629 h1.2
  text "G" at 30.879,2.004 h1.2
Board:
  the board outline again, w0.2